# Altium PCB LV_TERMINAL_BOARD_A_SAMPLE.PcbDoc
Units mm, origin at the board's own origin, x right, y up, seen from the top; angles counter-clockwise.
Board outline 136.1 x 67.5 mm, 2 copper layers (Top Layer, Bottom Layer); 22 components, 24 nets, 50 pads, 1 vias.
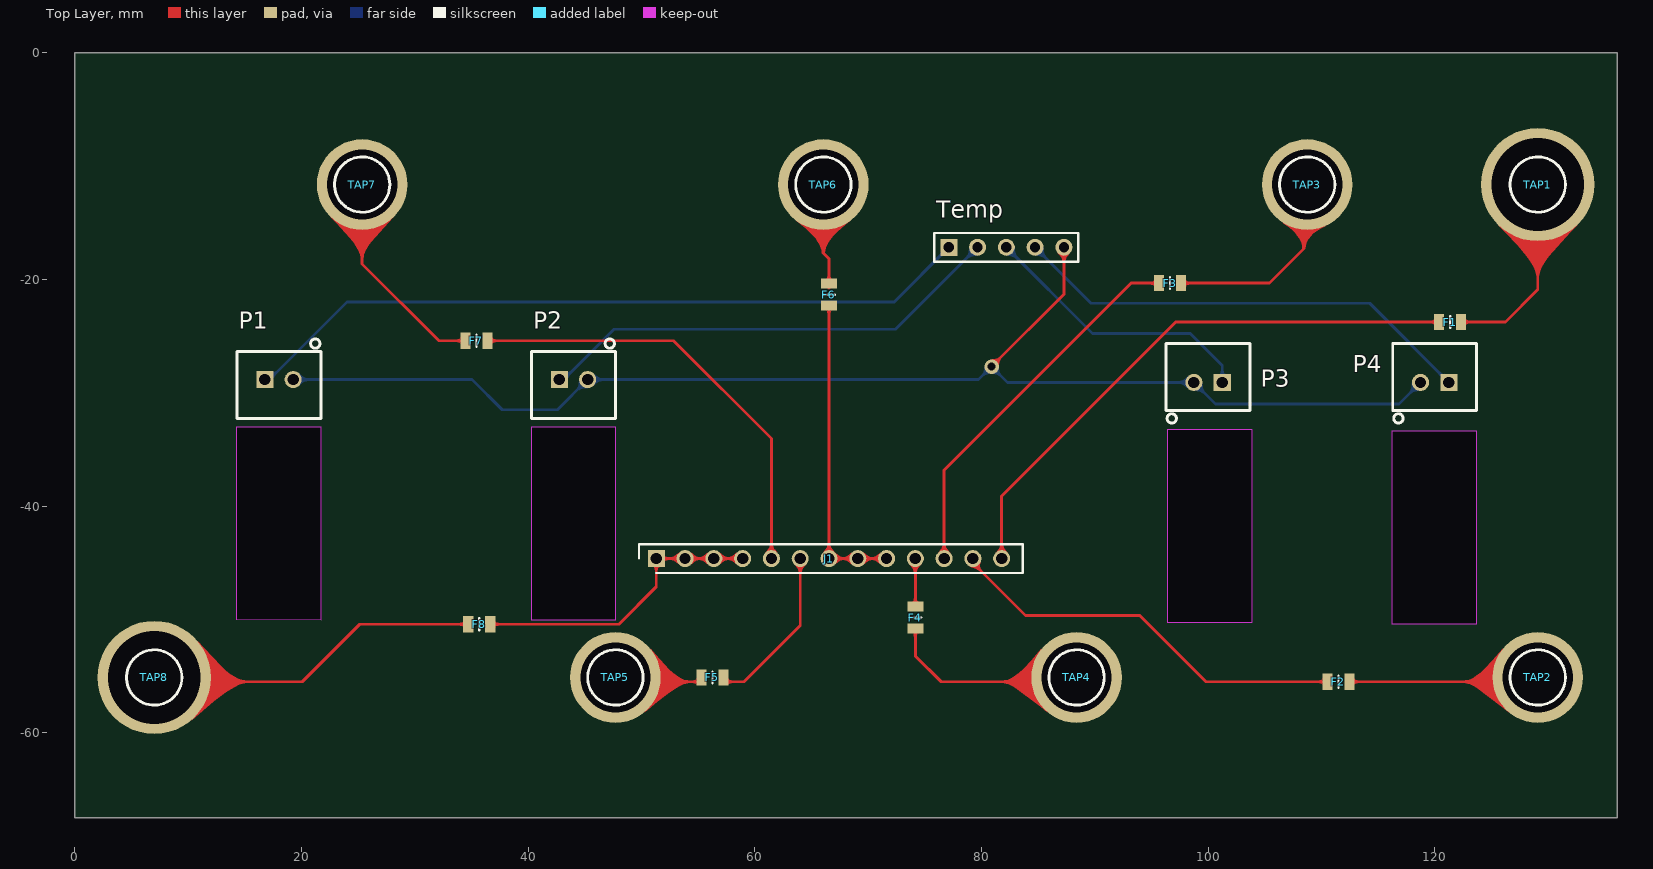
[diagram p0: Top Layer view]
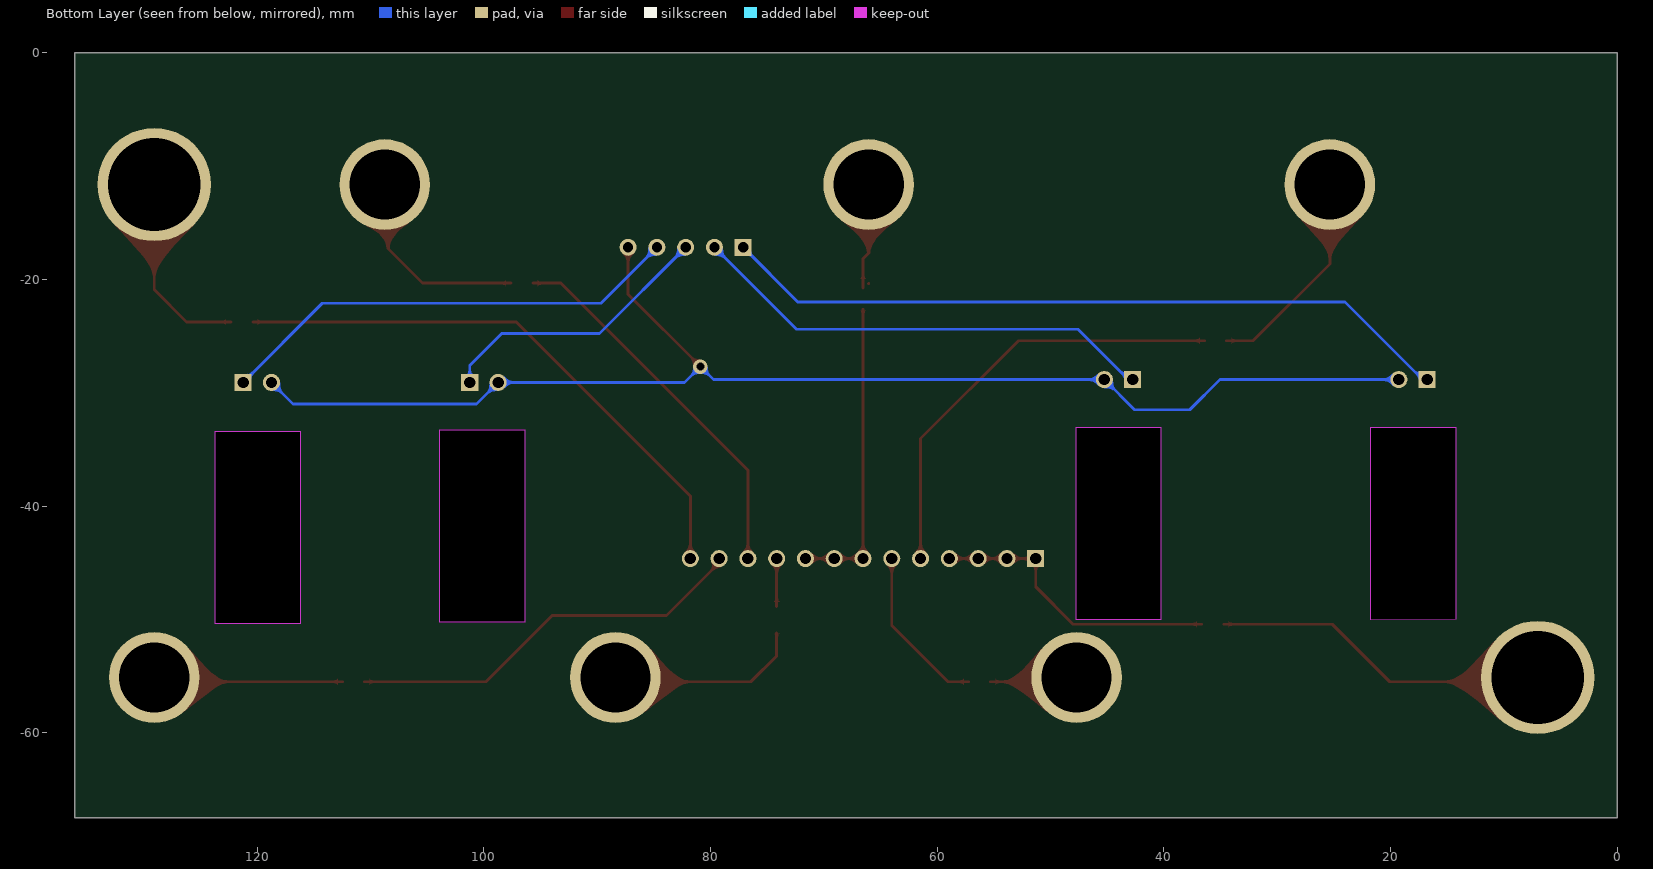
[diagram p1: Bottom Layer view, seen from below]
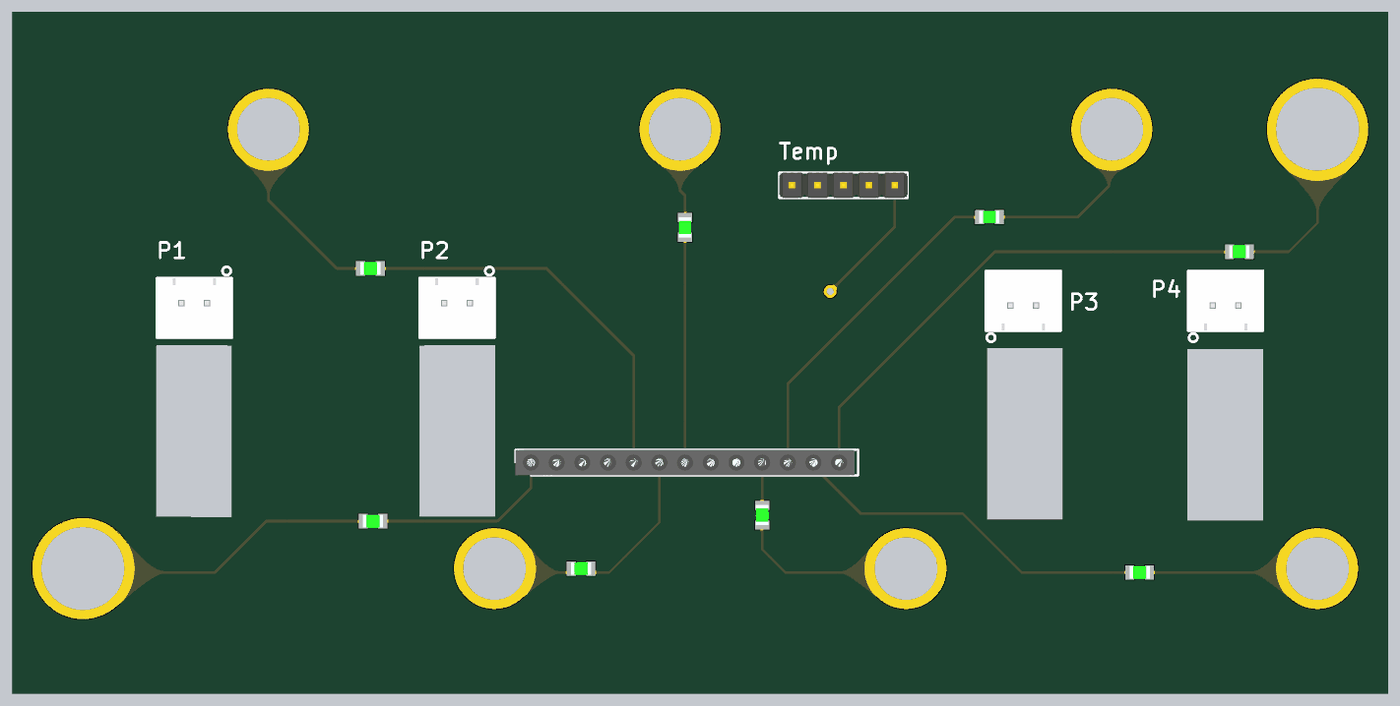
[diagram p2: 3D render of the assembled board from above, using the file's embedded part models]

## Layer stack, top to bottom
Top Solder: solder mask 0.0102, Solder Resist, Dk 3.5
Top Layer: signal copper 0.0356
Dielectric 1: dielectric 0.32, FR-4, Dk 4.8
Bottom Layer: signal copper 0.0356
Bottom Solder: solder mask 0.0102, Solder Resist, Dk 3.5

## Board outline
0,-67.5 136.1,-67.5 136.1,0 0,0
cut-out: 116.205,-33.401 116.205,-50.386 123.698,-50.386 123.698,-33.401 123.317,-33.401
cut-out: 96.393,-33.274 96.393,-50.259 103.886,-50.259 103.886,-33.274 103.505,-33.274
cut-out: 40.259,-33.02 40.259,-50.005 47.752,-50.005 47.752,-33.02 47.371,-33.02
cut-out: 14.224,-33.02 14.224,-50 21.724,-50.02 21.724,-33.02 20.066,-33.02

## Design rules (kind name [scope] priority, off if disabled: settings)
Clearance [All] p1: gap=0.254 ignorepadtopadclearanceinfootprint=FALSE except(0: Arc-Hole Track-Hole SMDPad-Hole THPad-Hole Via-Hole Fill-Hole Poly-Hole Region-Hole Text-Hole)
PolygonConnect [All] p1: connectstyle=Relief reliefconductorwidth=0.254 reliefentries=4 polygonreliefangle="90 Angle" airgapwidth=0.254
RoutingVias [All] p1: holewidth=0.711 width=1.27 viastyle="Through Hole" minholewidth=0.711 minwidth=1.27 maxholewidth=0.711 maxwidth=1.27
SolderMaskExpansion [All] p1: expansion=0.102 istentingtop=FALSE
Width [All] p1: maxlimit=0.254 minlimit=0.254 preferedwidth=0.254
30 further rules are at their usual default settings.

## Components (designator, comment, footprint, x,y, rotation, side; value= is the part's Value field where it differs from the comment)
F1 "MFU0805FF04000P100" FUSC2012X55N 121.366,-23.749 r180 top
F2 "MFU0805FF04000P100" FUSC2012X55N 111.506,-55.499 r180 top
F3 "MFU0805FF04000P100" FUSC2012X55N 96.647,-20.32 r180 top
F4 "MFU0805FF04000P100" FUSC2012X55N 74.168,-49.83 r90 top
F5 "MFU0805FF04000P100" FUSC2012X55N 56.261,-55.118 r0 top
F6 "MFU0805FF04000P100" FUSC2012X55N 66.548,-21.336 r270 top
F7 "MFU0805FF04000P100" FUSC2012X55N 35.433,-25.4 r0 top
F8 "MFU0805FF04000P100" FUSC2012X55N 35.687,-50.419 r0 top
J1 "PPPC131LFBN-RC" RHDR13W80P0X254_1X13_3352X254X850P 51.308,-44.624 r0 top
P1 "B2B-XH-A(LF)(SN)" "XH 2 PIN VERT" 18.014,-28.956 r0 top
P2 "B2B-XH-A(LF)(SN)" "XH 2 PIN VERT" 44,-28.956 r0 top
P3 "B2B-XH-A(LF)(SN)" "XH 2 PIN VERT" 100,-28.956 r180 top
P4 "B2B-XH-A(LF)(SN)" "XH 2 PIN VERT" 120,-28.956 r180 top
TAP1 "0850-0-15-20-83-14-11-0" 0850-0-15-20-83-14-11-0#1 129.1,-11.619 r0 top
TAP2 "0850-0-15-20-83-14-11-0" 0850-0-15-20-83-14-11-0#2 129.1,-55.119 r0 top
TAP3 "0850-0-15-20-83-14-11-0" 0850-0-15-20-83-14-11-0#2 108.75,-11.619 r0 top
TAP4 "0850-0-15-20-83-14-11-0" 0850-0-15-20-83-14-11-0#2 88.4,-55.119 r0 top
TAP5 "0850-0-15-20-83-14-11-0" 0850-0-15-20-83-14-11-0#2 47.7,-55.119 r0 top
TAP6 "0850-0-15-20-83-14-11-0" 0850-0-15-20-83-14-11-0#2 66.05,-11.619 r0 top
TAP7 "0850-0-15-20-83-14-11-0" 0850-0-15-20-83-14-11-0#2 25.35,-11.619 r0 top
TAP8 "0850-0-15-20-83-14-11-0" 0850-0-15-20-83-14-11-0#1 7,-55.119 r0 top
Temp "Comment" "TH 2.54mm Header 1x5" 77.118,-17.157 r0 top

## Footprints (in the part's own frame and the unit in brackets; to place one, negate y for a bottom-side part, rotate by r counter-clockwise, add the part's x,y. Pads: shape width x height; smd on the part's side, far side on the other; paste and mask are expansions set on the pad)
0850-0-15-20-83-14-11-0#1 [mm]
  round 10 hole 8.2 mask+0.102: 1(0,0)
  silkscreen extent -2.44,-2.44 2.44,2.44, body extent -1.94,-1.94 1.94,1.94, height 5.61
0850-0-15-20-83-14-11-0#2 [mm]
  round 8 hole 6.2 mask+0.102: 1(0,0)
  silkscreen extent -2.44,-2.44 2.44,2.44, body extent -1.94,-1.94 1.94,1.94, height 5.61
FUSC2012X55N [mm]
  rect 0.89x1.42 smd: 1(-0.97,0) 2(0.97,0)
  silkscreen extent 0,-0.53 0,0.53, body extent -1,-0.63 1,0.63, height 0.55
RHDR13W80P0X254_1X13_3352X254X850P [mm]
  rect 1.5x1.5 hole 1: 1(0,0)
  round 1.5 hole 1: 2(2.54,0) 3(5.08,0) 4(7.62,0) 5(10.16,0) 6(12.7,0) 7(15.24,0) 8(17.78,0) 9(20.32,0) 10(22.86,0) 11(25.4,0) 12(27.94,0) 13(30.48,0)
  silkscreen extent -1.52,-1.27 32.35,1.27, body extent -1.52,-1.27 32,1.27, height 8.5
"TH 2.54mm Header 1x5" [mm]
  rect 1.5x1.5 hole 0.9: 1(0,0)
  round 1.5 hole 0.9: 2(2.54,0) 3(5.08,0) 4(7.62,0) 5(10.16,0)
  silkscreen extent -1.27,-1.27 11.43,1.27, body extent -1.27,-1.27 11.43,1.27, height 9.5
"XH 2 PIN VERT" [mm]
  round 1.508 hole 1: 1(1.25,0.127)
  rect 1.508x1.508 hole 1: 2(-1.25,0.127)
  silkscreen extent -3.7,-3.3 3.7,3.71, body extent -3.61,-3.24 3.61,2.6, height 7.21

## Part data
F1 F2 F3 F4 F5 F6 F7 F8: "Fuse", Manufacturer_Name=Vishay, Mouser Part Number=594-MFU0805FF04000P1, Arrow Part Number=MFU0805FF04000P100, Arrow Price/Stock=https://www.arrow.com/en/products/mfu0805ff04000p100/vishay?region=nac, Datasheet Link=http://www.vishay.com/docs/28747/mfuserie.pdf, Height=0.55mm, Manufacturer_Part_Number=MFU0805FF04000P100, Mouser Price/Stock=https://www.mouser.co.uk/ProductDetail/Vishay-Beyschlag/MFU0805FF04000P100?qs=oI046glRurvInTGsRs7uKw%3D%3D
J1: "Connector", Manufacturer_Name=Sullins, Datasheet Link=https://datasheet.datasheetarchive.com/originals/dk/DKDS-20/386705.pdf, Height=8.5mm, Manufacturer_Part_Number=PPPC131LFBN-RC
P1 P2 P3 P4: Digikey Part Number=455-2247-ND, Angle=0, Contact=Tin, Digikey Link=https://www.digikey.com.au/en/products/detail/jst-sales-america-inc/B2B-XH-A-LF-SN/1651045, Flange=No, Part Number=B2B-XH-A(LF)(SN), Pitch=2.54mm, Positions=2, Row Spacing=2.54mm
TAP1 TAP2 TAP3 TAP4 TAP5 TAP6 TAP7 TAP8: Digikey Part Number=ED90436-ND, Angle=90, Contact=Gold, Digikey Link=https://www.digikey.com.au/products/en?keywords=0850-0-15-20-83-14-11-0, Flange=NA, Part Number=0850-0-15-20-83-14-11-0, Pitch=NA, Positions=1, Row Spacing=NA

## Via types
v1: diameter 1.27, hole 0.711, Top Layer to Bottom Layer, 1 vias

## Nets (pads, with @x,y where several pads share a name; then routed paths per layer and width w, separated by ;. In a path a pad name is that pad's centre, name@x,y a point inside that pad or via, vN(x,y) a via of type N, cw(c..) or ccw(c..) an arc to the next point about the centre after c; other vN are vias at no path point)
0: F1.2 J1.13 | length 50.9
  Top Layer w0.254: J1.13@81.788,-45.005 81.788,-39.116 97.155,-23.749 F1.2
1: F2.2 J1.12 | length 35.6
  Top Layer w0.254: J1.12@79.248,-45.005 83.9,-49.657 93.98,-49.657 99.822,-55.499 F2.2
2: F3.2 J1.11 | length 34
  Top Layer w0.254: J1.11@76.708,-45.005 76.708,-36.83 93.218,-20.32 F3.2
3: F4.2 J1.10 | length 4.2
  Top Layer w0.254: F4.2 J1.10
4: F6.2 J1.7 J1.8 J1.9 | length 27.1
  Top Layer w0.254: F6.2@66.548,-22.624 J1.7 J1.8 J1.9
5: F5.2 J1.6 | length 14.4
  Top Layer w0.254: F5.2@57.231,-55.499 59.055,-55.499 64.008,-50.546 J1.6@64.008,-45.005
6: F7.2 J1.5 | length 39.6
  Top Layer w0.254: F7.2 52.832,-25.4 61.468,-34.036 J1.5@61.468,-45.005
7: F8.2 J1.1 J1.2 J1.3 J1.4 | length 25.8
  Top Layer w0.254: F8.2 48.006,-50.419 51.308,-47.117 J1.1@51.308,-45.005 ; J1.1 J1.2 J1.3 J1.4
NetF1_1: F1.1 TAP1.1 | length 16.8
  Top Layer w0.254: F1.1 126.238,-23.749 129.1,-20.887 TAP1.1@129.1,-12
NetF2_1: F2.1 TAP2.1 | length 18.1
  Top Layer w0.254: F2.1 F2.1 129.1,-55.5 TAP2.1@129.1,-54.043
NetF3_1: F3.1 TAP3.1 | length 17.5
  Top Layer w0.254: F3.1 105.41,-20.32 108.46,-17.27 108.46,-12.29 TAP3.1@108.75,-12
NetF4_1: F4.1 TAP4.1 | length 17.2
  Top Layer w0.254: F4.1@74.168,-51.181 74.168,-53.213 76.455,-55.5 TAP4.1@88.4,-55.5
NetF5_1: F5.1 TAP5.1 | length 7.6
  Top Layer w0.254: TAP5.1@47.7,-55.5 55.29,-55.5 F5.1@55.291,-55.499
NetF6_1: F6.1 TAP6.1 | length 9
  Top Layer w0.254: F6.1@66.04,-20.366 F6.1@66.05,-20.356 ; TAP6.1@66.05,-12 66.05,-17.663 66.548,-18.161 F6.1@66.548,-20.747
NetF7_1: F7.1 TAP7.1 | length 18.5
  Top Layer w0.254: TAP7.1@25.35,-12 25.35,-18.619 32.131,-25.4 F7.1
NetF8_1: F8.1 TAP8.1 | length 29.8
  Top Layer w0.254: TAP8.1@7,-55.5 20.065,-55.5 25.146,-50.419 F8.1
TEMP+1: P1.2 Temp.1 | length 65.3
  Bottom Layer w0.254: P1.2@16.764,-29.21 24.003,-21.971 72.304,-21.971 Temp.1@77.118,-17.157
TEMP+2: P2.2 Temp.2 | length 41.9
  Bottom Layer w0.254: P2.2@42.75,-29.21 47.576,-24.384 72.431,-24.384 Temp.2
TEMP+3: P3.2 Temp.3 | length 24.9
  Bottom Layer w0.254: Temp.3 89.806,-24.765 98.425,-24.765 101.25,-27.59 P3.2
TEMP+4: P4.2 Temp.4 | length 41.5
  Bottom Layer w0.254: Temp.4 89.679,-22.098 114.265,-22.098 P4.2
TEMP-1: 
TEMP-2: 
TEMP-3: 
TEMP-4: P1.1 P2.1 P3.1 P4.1 Temp.5 | length 117.5
  Top Layer w0.254: v1(80.899,-27.686) 87.278,-21.307 Temp.5
  Bottom Layer w0.254: P1.1 35.052,-28.829 37.719,-31.496 42.583,-31.496 P2.1 79.756,-28.829 v1(80.899,-27.686) 82.296,-29.083 P3.1 100.655,-30.988 116.845,-30.988 P4.1

## Silkscreen, mask and mechanical layers (free items; w line width, h text height)
Mechanical 1:
  lines w0.254: 0,-67.5 136.1,-67.5 136.1,0 0,0 0,-67.5 ; 14.224,-50.01 21.724,-50.01 21.724,-33.02 14.224,-33.02 14.224,-50.01 ; 40.259,-50.005 47.759,-50.005 47.759,-33.02 40.259,-33.02 40.259,-50.005 ; 96.393,-50.259 103.893,-50.259 103.893,-33.274 96.393,-33.274 96.393,-50.259 ; 116.205,-50.386 123.705,-50.386 123.705,-33.401 116.205,-33.401 116.205,-50.386
Drill Drawing:
  circle w0.254: c11.192,37.232 r0.847
  lines w0.254: 10.345,28.765 12.039,28.765 12.039,30.459 10.345,30.459 10.345,28.765 ; 10.345,32.999 10.769,32.999 11.192,32.575 11.615,32.999 12.039,32.999 11.615,33.422 12.039,33.845 11.615,33.845 11.192,34.269 10.769,33.845 10.345,33.845 10.769,33.422 10.345,32.999 ; 10.345,40.195 11.192,40.619 12.039,40.195 11.615,41.042 12.039,41.889 11.192,41.465 10.345,41.889 10.769,41.042 10.345,40.195 ; 10.345,45.699 12.039,45.699 11.192,44.005 10.345,45.699
  lines w0.381: 8.826,27.622 282.918,27.622 ; 8.826,46.672 282.918,46.672 ; 22.819,23.812 22.819,50.482 ; 36.531,23.812 36.531,50.482 ; 65.987,23.812 65.987,50.482 ; 78.836,23.812 78.836,50.482 ; 97.474,23.812 97.474,50.482 ; 135.563,23.812 135.563,50.482 ; 150.545,23.812 150.545,50.482 ; 169.488,23.812 169.488,50.482 ; 192.342,23.812 192.342,50.482 ; 214.028,23.812 214.028,50.482 ; 247.901,23.812 247.901,50.482 ; 8.826,23.812 282.918,23.812 282.918,50.482 8.826,50.482 8.826,23.812
  text "Symbol" at 11.112,47.816 h1.83
  text "Count" at 23.962,47.816 h1.83
  text "Hole Size" at 37.674,47.816 h1.83
  text "Plated" at 67.13,47.816 h1.83
  text "Hole Type" at 79.979,47.816 h1.83
  text "Drill Layer Pair" at 98.617,47.816 h1.83
  text "Via/Pad" at 136.706,47.816 h1.83
  text "Pad Shape" at 151.688,47.816 h1.83
  text "Template" at 170.631,47.816 h1.83
  text "Description" at 193.485,47.816 h1.83
  text "Hole Tolerance (+)" at 215.171,47.816 h1.83
  text "Hole Tolerance (-)" at 249.044,47.816 h1.83
  text "1" at 23.962,44.005 h1.52
  text "0.711mm (28.00mil)" at 37.674,44.005 h1.52
  text "PTH" at 67.13,44.005 h1.52
  text "Round" at 79.979,44.005 h1.52
  text "Top Layer - Bottom Layer" at 98.617,44.005 h1.52
  text "Via" at 136.706,44.005 h1.52
  text "Rounded" at 151.688,44.005 h1.52
  text "v127h71" at 170.631,44.005 h1.52
  text "2" at 23.962,40.195 h1.52
  text "8.200mm (322.84mil)" at 37.674,40.195 h1.52
  text "PTH" at 67.13,40.195 h1.52
  text "Round" at 79.979,40.195 h1.52
  text "Top Layer - Bottom Layer" at 98.617,40.195 h1.52
  text "Pad" at 136.706,40.195 h1.52
  text "Rounded" at 151.688,40.195 h1.52
  text "c1000h820m1010" at 170.631,40.195 h1.52
  text "5" at 23.962,36.386 h1.52
  text "0.900mm (35.43mil)" at 37.674,36.386 h1.52
  text "PTH" at 67.13,36.386 h1.52
  text "Round" at 79.979,36.386 h1.52
  text "Top Layer - Bottom Layer" at 98.617,36.386 h1.52
  text "Pad" at 136.706,36.386 h1.52
  text "(Mixed)" at 151.688,36.386 h1.52
  text "(Mixed)" at 170.631,36.386 h1.52
  text "6" at 23.962,32.575 h1.52
  text "6.200mm (244.10mil)" at 37.674,32.575 h1.52
  text "PTH" at 67.13,32.575 h1.52
  text "Round" at 79.979,32.575 h1.52
  text "Top Layer - Bottom Layer" at 98.617,32.575 h1.52
  text "Pad" at 136.706,32.575 h1.52
  text "Rounded" at 151.688,32.575 h1.52
  text "c800h620m810" at 170.631,32.575 h1.52
  text "21" at 23.962,28.765 h1.52
  text "1.000mm (39.37mil)" at 37.674,28.765 h1.52
  text "PTH" at 67.13,28.765 h1.52
  text "Round" at 79.979,28.765 h1.52
  text "Top Layer - Bottom Layer" at 98.617,28.765 h1.52
  text "Pad" at 136.706,28.765 h1.52
  text "(Mixed)" at 151.688,28.765 h1.52
  text "(Mixed)" at 170.631,28.765 h1.52
  text "35 Total" at 23.962,24.956 h1.52
  text "FABRICATION NOTES" at 154.014,3.852 h3
  text "1. QUANTITY: 5" at 154.014,-1.244 h3
  text "2. SIZE: 136x68mm" at 154.014,-6.341 h3
  text "3. LAYERS: 2" at 154.014,-11.437 h3
  text "4. SIGNAL LAYERS: 1,2" at 154.014,-15.534 h3
  text "a) WEIGHT: 1oz" at 159.014,-21.63 h3
  text "5. SOLDER MASKS: Red" at 154.014,-27.919 h3
  text "6. SILKSCREEN: White" at 154.014,-33.016 h3
  text "7. SURFACE FINISH: OSP" at 154.014,-38.112 h3
  text "8. FINISHED COPPER: 2oz Cu" at 154.014,-43.208 h3
  text "9. TOTAL THICKNESS: 1.6mm" at 154.014,-48.305 h3
  text "FABRICATION NOTES" at 163.977,-768.651 h3
  text "1. QUANTITY: 5" at 163.977,-773.747 h3
  text "2. SIZE:" at 163.977,-778.844 h3
  text "3. LAYERS: 2" at 163.977,-783.94 h3
  text "4. SIGNAL LAYERS: 1,2" at 163.977,-788.037 h3
  text "a) WEIGHT: 1oz" at 168.977,-794.133 h3
  text "5. SOLDER MASKS: Red" at 163.977,-800.422 h3
  text "6. SILKSCREEN: White" at 163.977,-805.519 h3
  text "7. SURFACE FINISH: HASL (With Lead)" at 163.977,-810.615 h3
  text "8. FINISHED COPPER: 2oz Cu" at 163.977,-815.711 h3
  text "9. TOTAL THICKNESS: 1.6mm" at 163.977,-820.808 h3
  text "FABRICATION NOTES" at 176.423,-822.372 h3
  text "1. QUANTITY: 5" at 176.423,-827.468 h3
  text "FABRICATION NOTES" at 176.423,-830.119 h3
  text "2. SIZE:" at 176.423,-832.565 h3
  text "1. QUANTITY: 5" at 176.423,-835.215 h3
  text "3. LAYERS: 2" at 176.423,-837.661 h3
  text "CHECK CUTOUT ARE ROUTED CORRECTED (DEFINED ON KEEPOUT LAYER)" at 163.368,-838.123 h3
  text "2. SIZE:" at 176.423,-840.312 h3
  text "4. SIGNAL LAYERS: 1,2" at 176.423,-841.758 h3
  text "3. LAYERS: 2" at 176.423,-845.408 h3
  text "a) WEIGHT: 1oz" at 181.423,-847.854 h3
  text "4. SIGNAL LAYERS: 1,2" at 176.423,-849.505 h3
  text "5. SOLDER MASKS: Red" at 176.423,-854.143 h3
  text "a) WEIGHT: 1oz" at 181.423,-855.601 h3
  text "6. SILKSCREEN: White" at 176.423,-859.24 h3
  text "5. SOLDER MASKS: Red" at 176.423,-861.89 h3
  text "7. SURFACE FINISH: HASL (With Lead)" at 176.423,-864.336 h3
  text "6. SILKSCREEN: White" at 176.423,-866.987 h3
  text "8. FINISHED COPPER: 2oz Cu" at 176.423,-869.432 h3
  text "7. SURFACE FINISH: HASL (With Lead)" at 176.423,-872.083 h3
  text "9. TOTAL THICKNESS: 1.6mm" at 176.423,-874.529 h3
  text "8. FINISHED COPPER: 2oz Cu" at 176.423,-877.179 h3
  text "9. TOTAL THICKNESS: 1.6mm" at 176.423,-882.276 h3
  text "CHECK CUTOUT ARE ROUTED CORRECTED (DEFINED ON KEEPOUT LAYER)" at 175.814,-891.844 h3
  text "CHECK CUTOUT ARE ROUTED CORRECTED (DEFINED ON KEEPOUT LAYER)" at 175.814,-899.591 h3